# Altium PCB shoot.PcbDoc
Units mm, origin at the board's own origin, x right, y up, seen from the top; angles counter-clockwise.
Board outline 85.46 x 60.94 mm, 2 copper layers (Top Layer, Bottom Layer); 14 components, 15 nets, 56 pads, 0 vias.
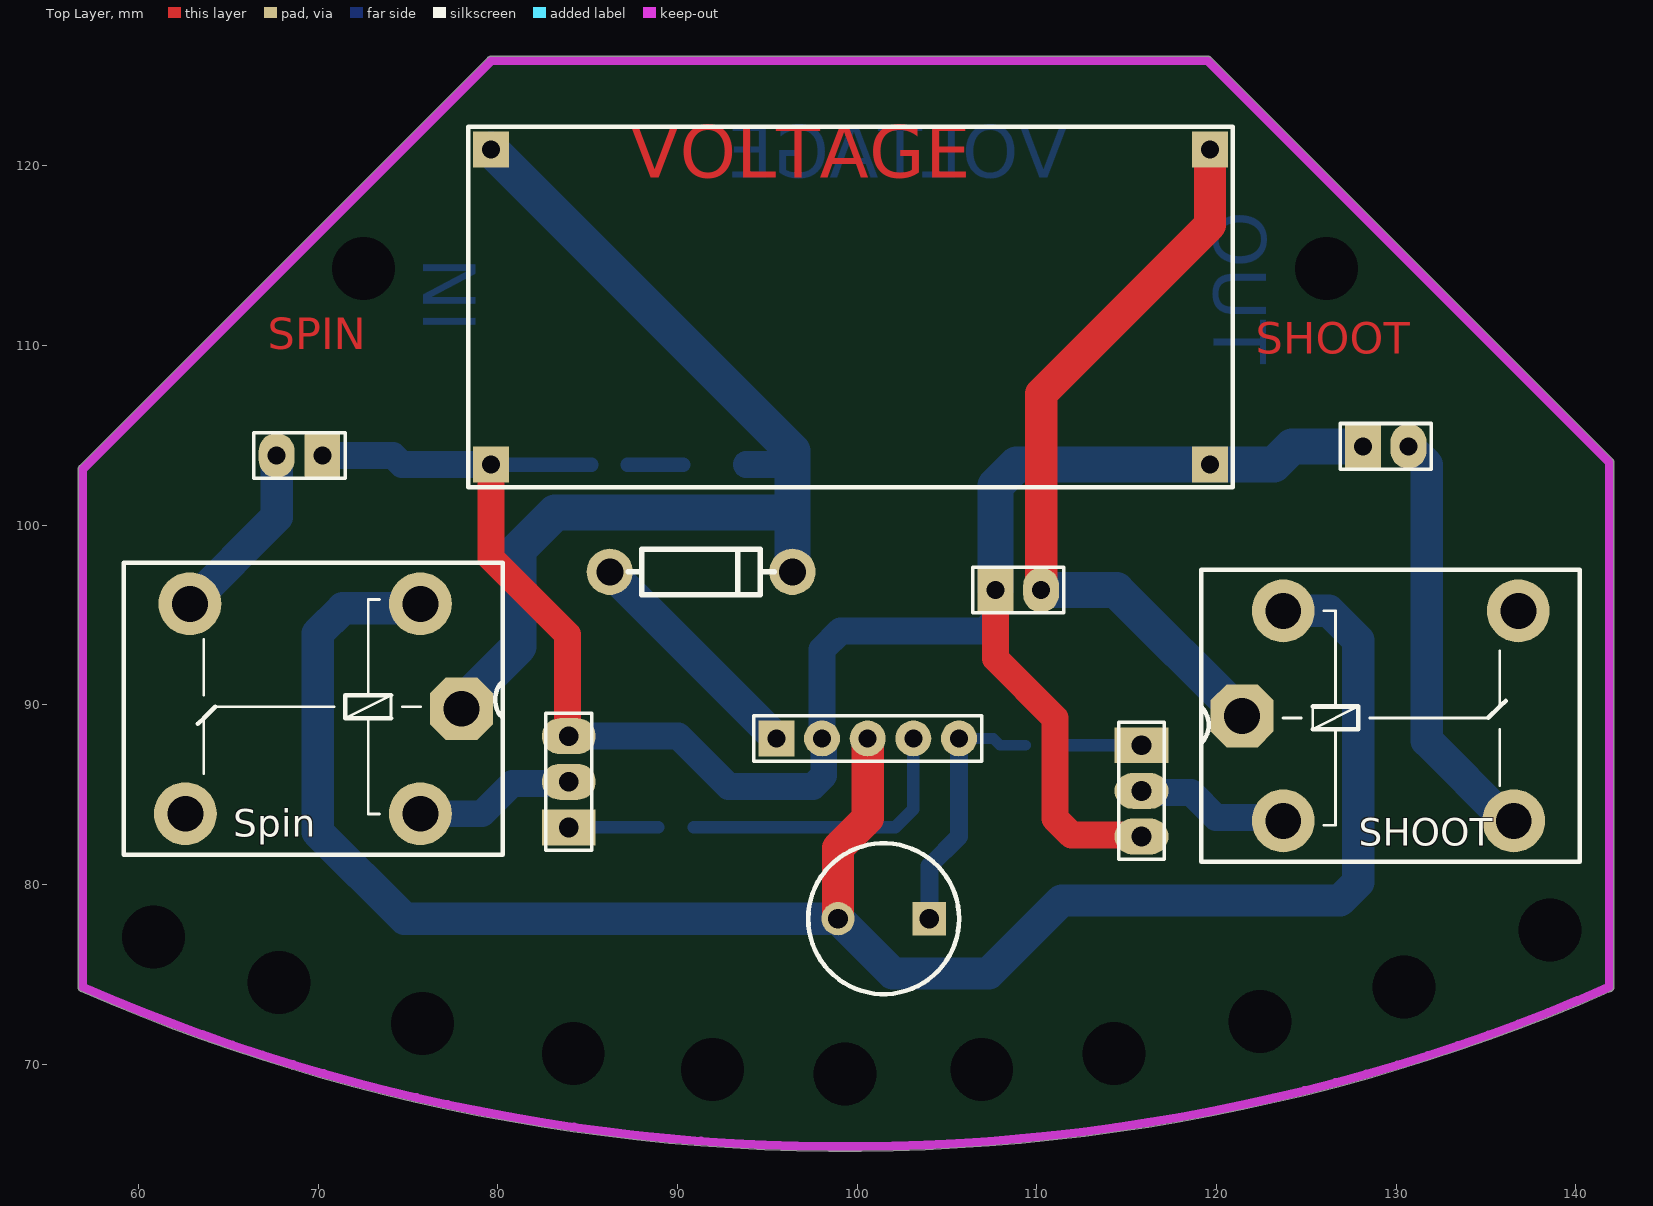
[diagram p0: Top Layer view]
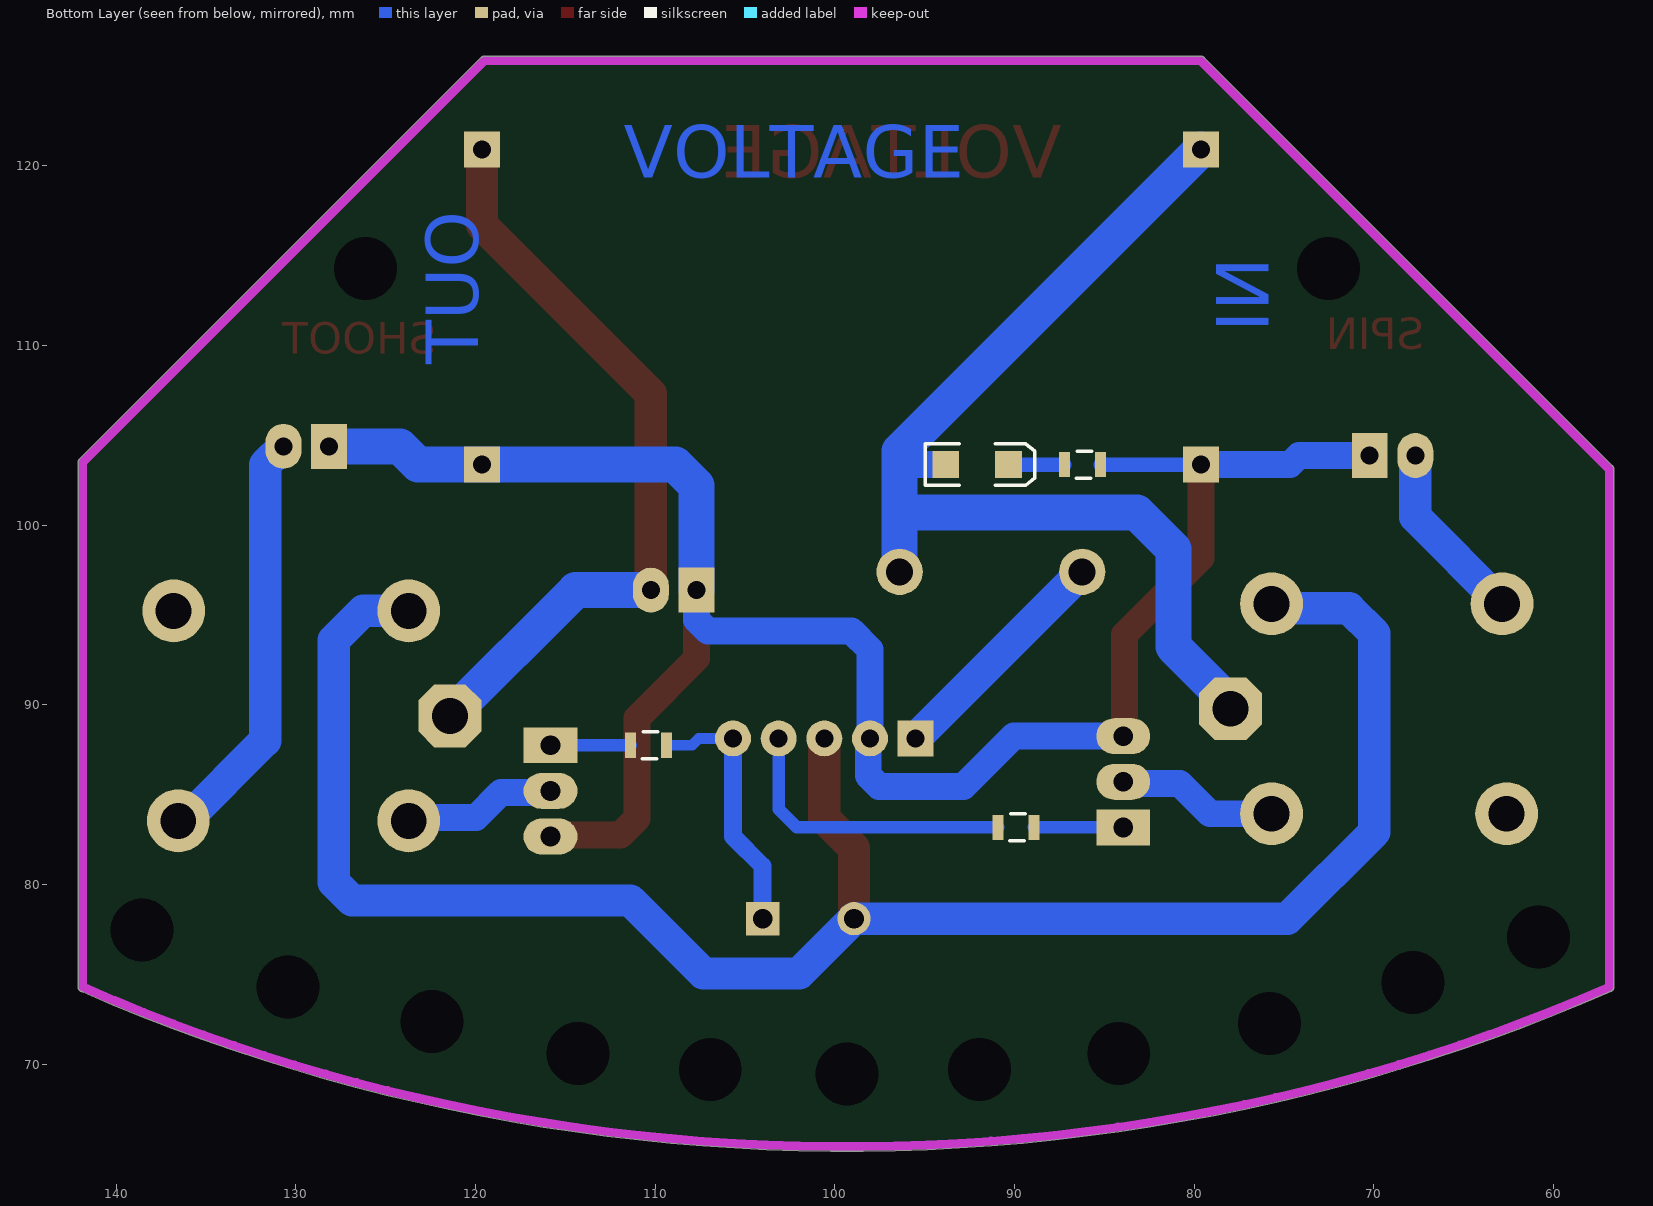
[diagram p1: Bottom Layer view, seen from below]
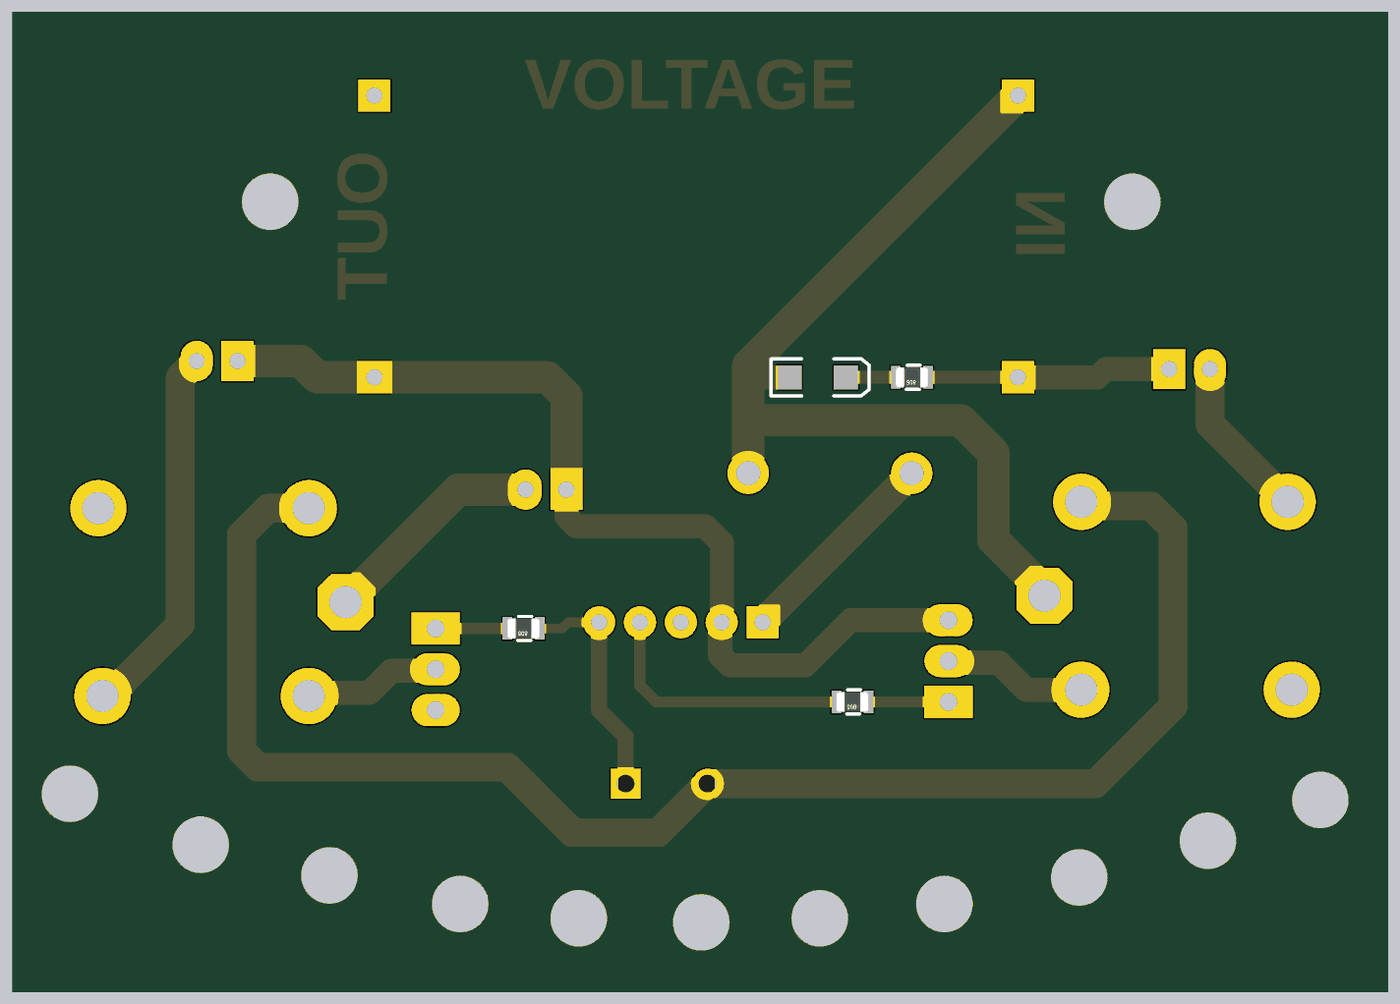
[diagram p2: 3D render of the assembled board from below, using the file's embedded part models]

## Layer stack, top to bottom
Top Solder: solder mask 0.0102, Solder Resist, Dk 3.5
Top Layer: signal copper 0.0356
Dielectric 1: dielectric 0.32, FR-4, Dk 4.8
Bottom Layer: signal copper 0.0356
Bottom Solder: solder mask 0.0102, Solder Resist, Dk 3.5

## Board outline
56.646,74.295 56.646,103.124 cw(c56.896,103.124) 56.719,103.301 79.452,126.034 ccw(c79.629,125.857) 79.452,126.034 cw(c79.629,125.857) 79.629,126.107 119.507,126.107 cw(c119.507,125.857) 119.684,126.034 cw(c119.507,125.857) 119.684,126.034 142.036,103.682 ccw(c141.859,103.505) 142.036,103.682 cw(c141.859,103.505) 142.109,103.505 142.109,74.295 cw(c141.859,74.295) 141.892,74.047 cw(c141.756,74.257) 141.856,74.027 cw(c99.369,171.414) 56.797,74.065 cw(c56.896,74.295)

## Design rules (kind name [scope] priority, off if disabled: settings)
Clearance [All] p1: gap=0.254 ignorepadtopadclearanceinfootprint=FALSE except(0: Arc-Hole Track-Hole SMDPad-Hole THPad-Hole Via-Hole Fill-Hole Poly-Hole Region-Hole Text-Hole)
PolygonConnect [All] p1: connectstyle=Relief reliefconductorwidth=0.254 reliefentries=4 polygonreliefangle="90 Angle" airgapwidth=0.254
RoutingVias [All] p1: holewidth=0.711 width=1.27 viastyle="Through Hole" minholewidth=0.711 minwidth=1.27 maxholewidth=0.711 maxwidth=1.27
SolderMaskExpansion [All] p1: expansion=0.102 istentingtop=FALSE
Width [All] p1: maxlimit=3 minlimit=0.254 preferedwidth=1
30 further rules are at their usual default settings.

## Components (designator, comment, footprint, x,y, rotation, side; value= is the part's Value field where it differs from the comment)
SHOOT "Comment" My_rel 128.397,89.408 r90 top
Spin "Comment" My_rel 71.006,89.776 r270 top
? "" DIODE0.4 86.233,97.409 r0 top
? "Comment" 3.2X1.6X1.1 92.075,103.378 r180 bottom
? "Comment" MY_RES_SMD_0805 86.217,103.378 r0 bottom
? "Comment" MY_RES_SMD_0805 110.363,87.757 r0 bottom
? "Comment" MY_RES_SMD_0805 89.916,83.185 r0 bottom
? "Comment" MY_SPST_2 101.473,78.105 r180 top
? "Comment" HDR1X5 95.504,88.138 r0 top
? "Comment" HDR1X2 107.696,96.393 r0 top
? "Comment" HDR1X2 70.231,103.886 r180 top
? "Comment" HDR1X2 128.143,104.394 r0 top
? "Comment" HDR1X3 115.824,87.757 r270 top
? "Comment" HDR1X3 83.947,83.185 r90 top

## Footprints (in the part's own frame and the unit in brackets; to place one, negate y for a bottom-side part, rotate by r counter-clockwise, add the part's x,y. Pads: shape width x height; smd on the part's side, far side on the other; paste and mask are expansions set on the pad)
3.2X1.6X1.1 [mm] "SMT LED; 2 Flat Leads"
  rect 1.5x1.5 smd: 1(-1.75,0) 2(1.75,0)
  silkscreen extent -2.9,-1.15 3.2,1.15
DIODE0.4 [mm]
  round 2.575 hole 1.5: 17(0,0) 18(10.16,0)
  silkscreen extent 1.02,-1.27 9.14,1.27
HDR1X2 [mm] "Connector; Header; 2 Position"
  rect 2x2.5 hole 1: 1(0,0)
  oval 2x2.5 hole 1: 2(2.54,0)
  silkscreen extent -1.27,-1.27 3.81,1.27
HDR1X3 [mm] "Connector; Header; 3 Position"
  rect 2x3 hole 1.1: 1(0,0)
  oval 2x3 hole 1.1: 2(2.54,0) 3(5.08,0)
  silkscreen extent -1.27,-1.27 6.35,1.27
HDR1X5 [mm] "Connector; Header; 5 Position"
  rect 2x2 hole 1: 1(0,0)
  round 2 hole 1: 2(2.54,0) 3(5.08,0) 4(7.62,0) 5(10.16,0)
  silkscreen extent -1.27,-1.27 11.43,1.27
My_rel [mm]
  oct 3.5x3.5 hole 2: 1(-0.013,6.972)
  round 3.5 hole 2: 2(-5.855,-8.141) 3(5.829,-8.395) 4(-5.855,4.686) 5(5.829,4.686)
  silkscreen extent -8.14,-11.82 8.12,9.26
MY_RES_SMD_0805 [mm]
  rect 0.6x1.4 smd: 1(-1,0) 2(1,0)
  silkscreen extent -0.5,-0.75 0.35,0.75, body extent -1,-0.62 1,0.63, height 0.78
MY_SPST_2 [mm]
  rect 1.85x1.85 hole 1.1: 1(-2.54,0)
  round 1.85 hole 1.1: 2(2.54,0)
  silkscreen extent -4.2,-4.19 4.2,4.19, body extent -5,-3.08 5,2.92, height 5.4

## Free pads (board coordinates)
  rect 2x2 hole 1: 2(79.629,103.378) 2(79.629,120.904) 2(119.634,103.378) 2(119.634,120.904)
  round 1.524 hole 3.5: 3(60.833,77.089) 3(67.818,74.549) 3(72.517,114.3) 3(75.819,72.263) 3(84.201,70.612) 3(91.948,69.723) 3(99.314,69.469) 3(106.934,69.723) 3(114.3,70.612) 3(122.428,72.39) 3(126.111,114.3) 3(130.429,74.295) 3(138.557,77.47)

## Nets (pads, with @x,y where several pads share a name; then routed paths per layer and width w, separated by ;. In a path a pad name is that pad's centre, name@x,y a point inside that pad or via, vN(x,y) a via of type N, cw(c..) or ccw(c..) an arc to the next point about the centre after c; other vN are vias at no path point)
5V: 
12V: ?.1@93.825,103.378 ?.18 pad.2@79.629,120.904 Spin.1 | length 59.3
  Bottom Layer w1.5: ?.1@93.825,103.378 96.266,103.378
  Bottom Layer w2: Spin.1 77.978,90.078 81.153,93.253 81.153,98.679 83.185,100.711 96.393,100.711 ; pad.2@79.629,120.904 96.393,104.14 96.393,103.251 ; 96.266,103.378 96.393,103.251 ; ?.18 96.393,100.711 ; 96.393,100.711 96.393,103.251
BASE1: ?.1@83.947,83.185 ?.1@88.916,83.185 | length 5
  Bottom Layer w0.7: ?.1@83.947,83.185 ?.1@88.916,83.185
BASE2: ?.1@115.824,87.757 ?.2@111.363,87.757 | length 4.5
  Bottom Layer w0.7: ?.2@111.363,87.757 ?.1@115.824,87.757
GND: ?.1@70.231,103.886 ?.1@85.217,103.378 ?.1@107.696,96.393 ?.1@128.143,104.394 ?.2@98.044,88.138 ?.3@83.947,88.265 ?.3@115.824,82.677 pad.2@79.629,103.378 pad.2@119.634,103.378 | length 113.2
  Top Layer w1.5: pad.2@79.629,103.378 79.629,98.171 83.872,93.928 ?.3@83.872,88.34 ; ?.1@107.696,96.393 107.696,92.583 110.998,89.281 110.998,83.693 111.918,82.773 115.728,82.773 ?.3@115.824,82.677
  Bottom Layer w0.8: pad.2@79.629,103.378 ?.1@85.217,103.378
  Bottom Layer w1.5: ?.1@70.231,103.886 74.168,103.886 74.676,103.378 pad.2@79.629,103.378 ; ?.3@83.872,88.34 83.947,88.265 90.043,88.265 92.837,85.471 97.536,85.471 98.14,86.075 98.14,88.042 98.044,88.138 98.044,93.091 99.06,94.107 107.061,94.107 107.696,94.742 ?.1@107.696,96.393
  Bottom Layer w2: ?.1@107.696,96.393 107.696,102.206 108.868,103.378 119.634,103.378 123.19,103.378 124.206,104.394 ?.1@128.143,104.394
LED: ?.2@87.217,103.378 ?.2@90.325,103.378 | length 3.1
  Bottom Layer w0.8: ?.2@87.217,103.378 ?.2@90.325,103.378
SHOOT: ?.1@104.013,78.105 ?.1@109.363,87.757 ?.5 | length 14.6
  Bottom Layer w0.6: ?.5 107.569,88.138 107.95,87.757 ?.1@109.363,87.757
  Bottom Layer w1: ?.1@104.013,78.105 104.013,81.026 105.664,82.677 ?.5
SPIN: ?.2@90.916,83.185 ?.4 | length 16.6
  Bottom Layer w0.7: ?.2@90.916,83.185 102.108,83.185 103.124,84.201 ?.4
TIP1: ?.2@83.947,85.725 Spin.5 | length 9
  Bottom Layer w1.5: Spin.5 79.121,83.947 80.803,85.629 83.851,85.629 ?.2@83.947,85.725
TIP2: ?.2@115.824,85.217 SHOOT.4 | length 8.6
  Bottom Layer w1.5: ?.2@115.824,85.217 115.92,85.121 118.587,85.121 119.965,83.743 123.521,83.743 SHOOT.4
VCC: ?.2@98.933,78.105 ?.3@100.584,88.138 SHOOT.5 Spin.4 | length 109.8
  Top Layer w1.8: ?.2@98.933,78.105 98.933,82.042 100.584,83.693 ?.3@100.584,88.138
  Bottom Layer w1.8: Spin.4 75.438,95.377 71.374,95.377 69.977,93.98 69.977,82.931 74.803,78.105 98.933,78.105 101.981,75.057 107.315,75.057 111.379,79.121 126.873,79.121 127.889,80.137 127.889,93.599 126.251,95.237 SHOOT.5
Vin: ?.1@95.504,88.138 ?.17 | length 13.1
  Bottom Layer w1.8: ?.17 ?.1@95.504,88.138
VOUT: ?.2@110.236,96.393 pad.2@119.634,120.904 SHOOT.1 | length 42.5
  Top Layer w1.8: ?.2@110.236,96.393 110.236,107.315 119.634,116.713 pad.2@119.634,120.904
  Bottom Layer w2: ?.2@110.236,96.393 114.427,96.393 SHOOT.1
VSHOOT: ?.2@130.683,104.394 SHOOT.2 | length 23.5
  Bottom Layer w1.8: ?.2@130.683,104.394 131.699,103.378 131.699,88.011 136.157,83.553 SHOOT.2
VSPIN: ?.2@67.691,103.886 Spin.2 | length 10.3
  Bottom Layer w1.8: Spin.2 67.691,100.457 ?.2@67.691,103.886
pads on no net: SHOOT.3 Spin.3

## Keep-outs
Keep-Out Layer:
  lines w0.5: 141.756,74.257 cw(c99.369,171.414) 56.896,74.295 56.896,103.124 79.629,125.857 119.507,125.857 141.859,103.505 141.859,74.295

## Other copper
Top Layer:
  text "VOLTAGE" at 87.376,118.364 h5
  text "SPIN" at 67.183,109.22 h3
  text "SHOOT" at 122.174,108.966 h3
Bottom Layer:
  text "VOLTAGE" at 111.76,118.364 h5
  text "OUT" at 118.872,117.475 h5 r270
  text "IN" at 79.756,110.744 h5 r90

## Silkscreen, mask and mechanical layers (free items; w line width, h text height)
Top Overlay:
  lines w0.254: 78.359,102.108 78.359,122.174 120.904,122.174 120.904,102.108 78.359,102.108